# Altium PCB main.PcbDoc
Units mm, origin at the board's own origin, x right, y up, seen from the top; angles counter-clockwise.
Board outline 26 x 25.84 mm, 2 copper layers (Top Layer, Bottom Layer); 4 components, 4 nets, 12 pads, 0 vias.
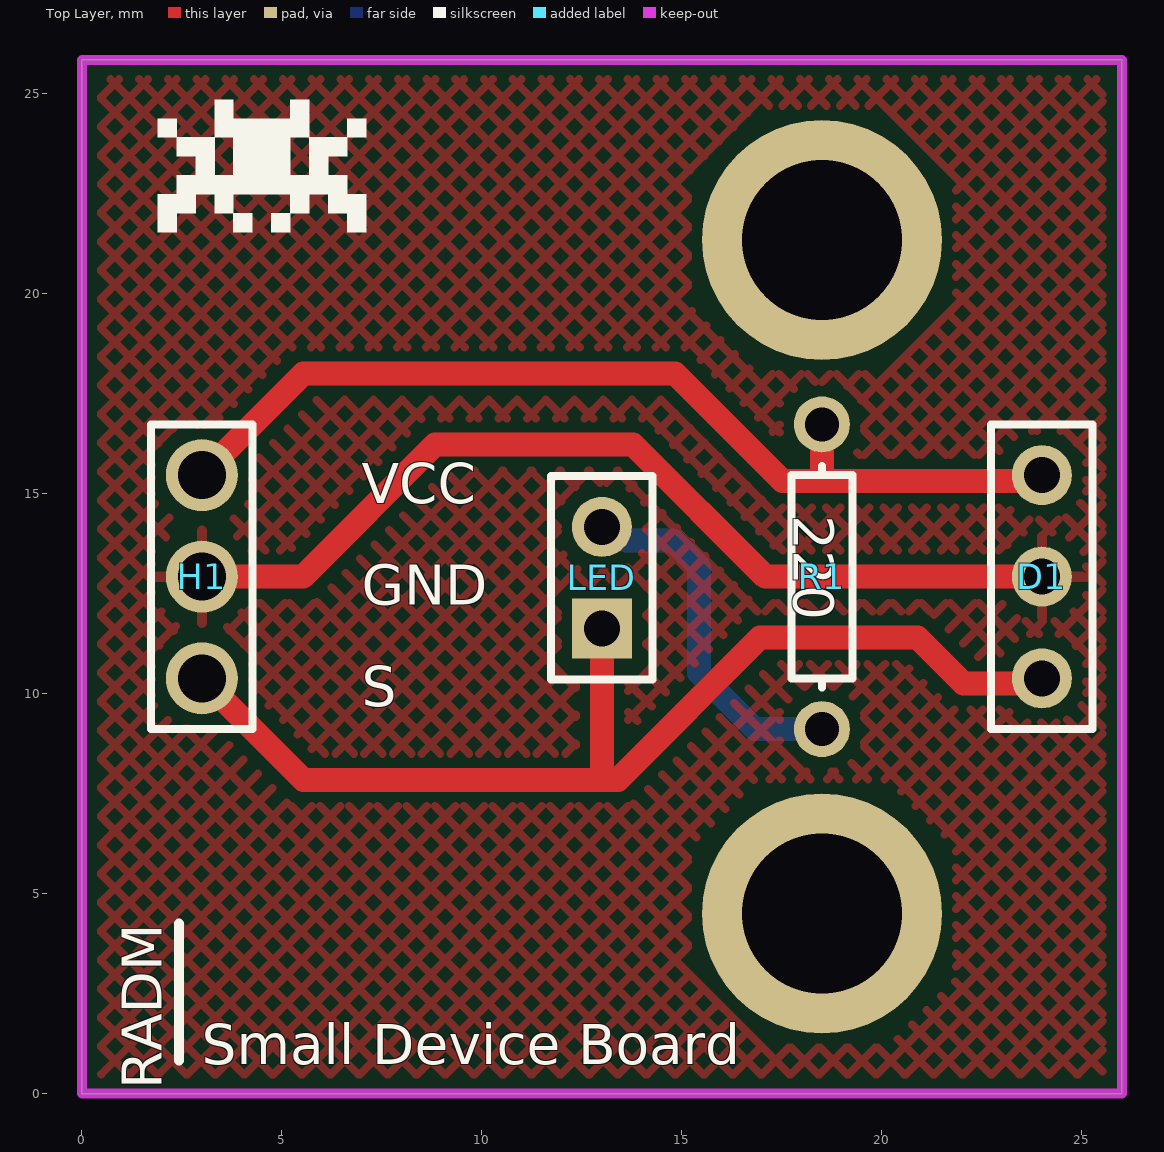
[diagram p0: Top Layer view]
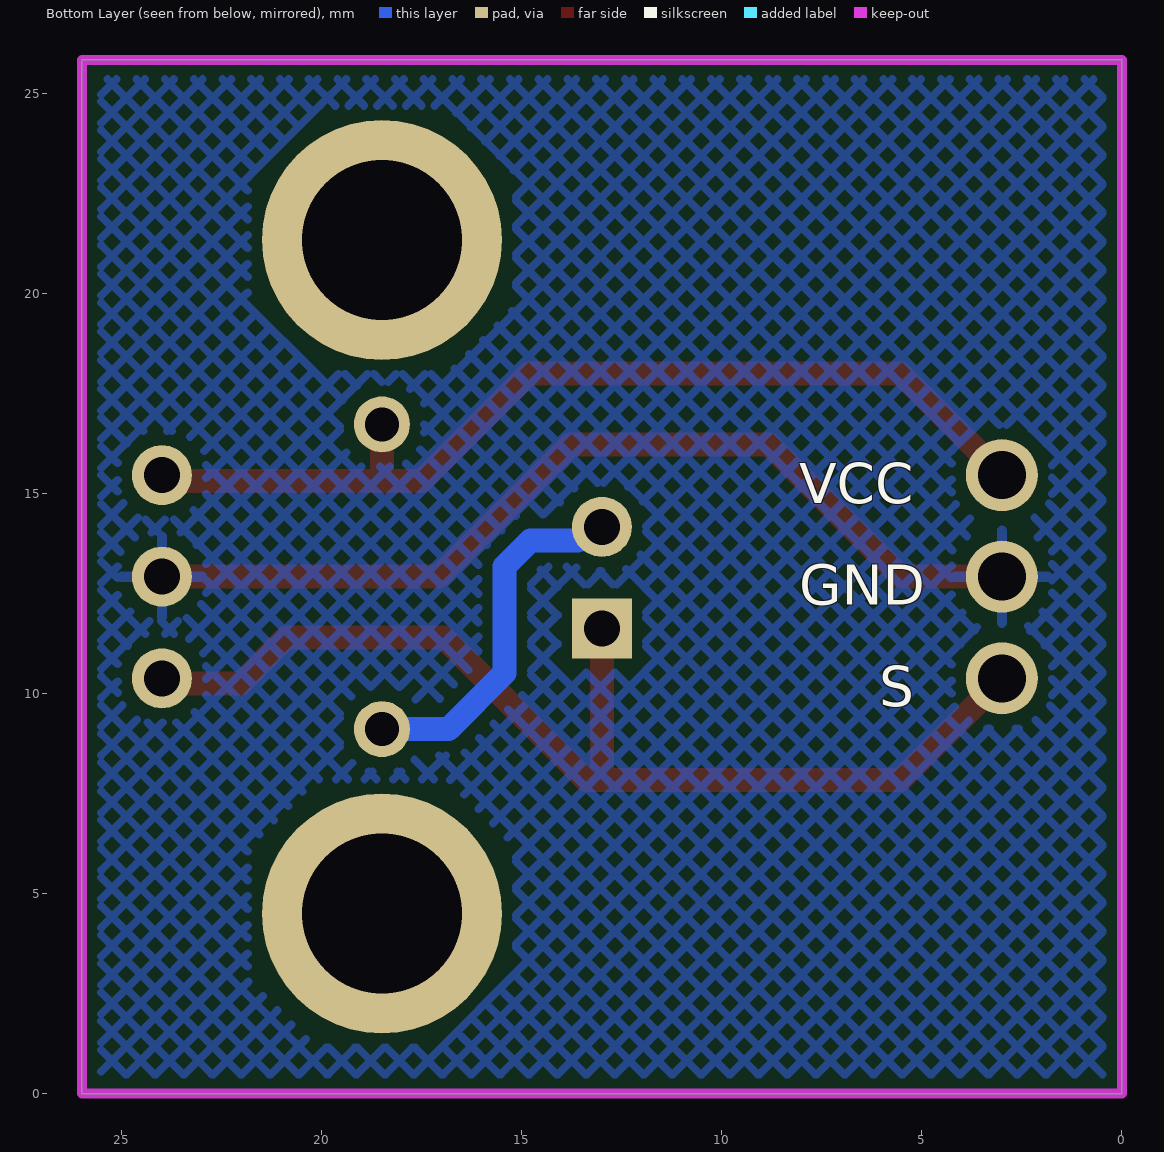
[diagram p1: Bottom Layer view, seen from below]

## Layer stack, top to bottom
Top Solder: solder mask 0.0102, Solder Resist, Dk 3.5
Top Layer: signal copper 0.0356
Dielectric 1: dielectric 0.32, FR-4, Dk 4.8
Bottom Layer: signal copper 0.0356
Bottom Solder: solder mask 0.0102, Solder Resist, Dk 3.5

## Board outline
0,0 0,25.84 26,25.84 26,0

## Design rules (kind name [scope] priority, off if disabled: settings)
Clearance [All] p1: gap=0.254 ignorepadtopadclearanceinfootprint=FALSE except(0: Arc-Hole Track-Hole SMDPad-Hole THPad-Hole Via-Hole Fill-Hole Poly-Hole Region-Hole Text-Hole)
PolygonConnect [All] p1: connectstyle=Relief reliefconductorwidth=0.254 reliefentries=4 polygonreliefangle="90 Angle" airgapwidth=0.254
RoutingVias [All] p1: holewidth=0.711 width=1.27 viastyle="Through Hole" minholewidth=0.711 minwidth=1.27 maxholewidth=0.711 maxwidth=1.27
SolderMaskExpansion [All] p1: expansion=0.102 istentingtop=FALSE
Width [All] p1: maxlimit=0.6 minlimit=0.4 preferedwidth=0.4
30 further rules are at their usual default settings.

## Components (designator, comment, footprint, x,y, rotation, side; value= is the part's Value field where it differs from the comment)
D1 "Small Device" HDR1X3 24,15.46 r270 top
H1 "JST Female 3 Pin" "Jst Female 3pin" 3,15.46 r270 top
LED "LED" "Small Blue LED" 13,14.165 r270 top
R1 "Res1" AXIAL-0.3 18.5,12.92 r90 top value=220

## Footprints (in the part's own frame and the unit in brackets; to place one, negate y for a bottom-side part, rotate by r counter-clockwise, add the part's x,y. Pads: shape width x height; smd on the part's side, far side on the other; paste and mask are expansions set on the pad)
AXIAL-0.3 [mm] "Axial Device, Thru-Hole; 2 Leads; 0.3 in Pin Spacing"
  round 1.4 hole 0.85: 1(-3.81,0) 2(3.81,0)
  silkscreen extent -2.77,-0.76 2.77,0.76
HDR1X3 [mm] "Connector; Header; 3 Position"
  round 1.5 hole 0.9: 1(0,0) 2(2.54,0) 3(5.08,0)
  silkscreen extent -1.27,-1.27 6.35,1.27
"Jst Female 3pin" [mm]
  round 1.8 hole 1.2: 1(0,0) 2(2.54,0) 3(5.08,0)
  silkscreen extent -1.27,-1.27 6.35,1.27, body extent -2.47,-2.33 7.41,3.42, height 7.88
"Small Blue LED" [mm]
  round 1.5 hole 0.9: 1(0,0)
  rect 1.5x1.5 hole 0.9: 2(2.54,0)
  silkscreen extent -1.27,-1.27 3.81,1.27, body extent -0.63,-1.92 2.95,1.92, height 5.6

## Part data
D1: library part "Header 3", "Header, 3-Pin", LatestRevisionDate=17-Jul-2002, LatestRevisionNote="Re-released for DXP Platform.", Publisher="Altium Limited"
LED: library part "Small LED", "3mm LED", Color=Red
R1: "Resistor", LatestRevisionDate=17-Jul-2002, LatestRevisionNote="Re-released for DXP Platform.", PackageDescription="Axial Device, Thru-Hole; 2 Leads; 0.3 in Pin Spacing", PackageReference=AXIAL-0.3, Published=8-Jun-2000, Publisher="Altium Limited"

## Free pads (board coordinates)
  round 6 hole 4: X(18.5,4.5) X(18.5,21.34)

## Nets (pads, with @x,y where several pads share a name; then routed paths per layer and width w, separated by ;. In a path a pad name is that pad's centre, name@x,y a point inside that pad or via, vN(x,y) a via of type N, cw(c..) or ccw(c..) an arc to the next point about the centre after c; other vN are vias at no path point)
GND: D1.2 H1.2 | length 23.7
  Top Layer w0.6: H1.2 5.523,12.92 8.827,16.224 13.78,16.224 17.084,12.92 D1.2
NetLED_1: LED.1 R1.1 | length 9.1
  Bottom Layer w0.6: LED.1@13.051,14.19 13.244,14.19 13.61,13.824 14.783,13.824 15.431,13.176 15.431,10.509 16.83,9.11 R1.1
Signal: D1.3 H1.3 LED.2 | length 27.9
  Top Layer w0.4: D1.3@23.875,10.255 D1.3
  Top Layer w0.6: H1.3 5.54,7.84 13,7.84 ; LED.2@13,11.65 LED.2 13,7.84 ; D1.3@23.875,10.255 22.035,10.255 20.892,11.398 16.955,11.398 13.397,7.84 13,7.84
VCC: D1.1 H1.1 R1.2 | length 24.5
  Top Layer w0.6: H1.1 5.54,18 14.824,18 17.515,15.309 23.849,15.309 D1.1 ; 18.5,15.415 R1.2

## Polygon pours and split planes (outlines as drawn)
GND on Top Layer "GND_L01_P001" (hatched 45Degree grid 0.508 track 0.203, pour order 1): 0,0 26,0 26,25.84 0,25.84
GND on Bottom Layer "GND_L02_P000" (hatched 45Degree grid 0.508 track 0.203, pour order 0): 0,0 26,0 26,25.84 0,25.84

## Keep-outs
Keep-Out Layer:
  the board outline again, w0.254

## Silkscreen, mask and mechanical layers (free items; w line width, h text height)
Top Overlay:
  region: 2.362,23.901 1.892,23.901 1.892,24.375 2.367,24.375 2.367,23.901
  region: 5.211,21.94 5.211,21.53 4.737,21.53 4.737,22.005 5.211,22.005 5.211,21.945
  region: 6.703,23.901 6.634,23.901 6.634,24.375 7.108,24.375 7.108,23.901 6.708,23.901
  region: 3.977,22.005 4.263,22.005 4.263,21.53 3.789,21.53 3.789,22.005 3.972,22.005
  region: 3.315,24.01 3.315,24.849 3.789,24.849 3.789,24.375 5.211,24.375 5.211,24.849 5.686,24.849 5.686,23.901 5.211,23.901 5.211,22.953 5.686,22.953 5.686,23.901 6.634,23.901 6.634,23.427 6.16,23.427 6.16,22.953 6.634,22.953 6.634,22.479 7.108,22.479 7.108,21.53 6.634,21.53 6.634,22.005 6.16,22.005 6.16,22.479 5.686,22.479 5.686,22.005 5.211,22.005 5.211,22.479 3.789,22.479 3.789,22.005 3.315,22.005 3.315,22.479 2.841,22.479 2.841,22.005 2.367,22.005 2.367,21.53 1.892,21.53 1.892,22.479 2.367,22.479 2.367,22.953 2.841,22.953 2.841,23.427 2.367,23.427 2.367,23.901 3.315,23.901 3.315,22.953 3.789,22.953 3.789,23.901 3.315,23.901 3.315,24.005
  lines w0.254: 2.429,0.825 2.429,4.254
  text "VCC" at 7,14.76 h1
  text "220" at 17.8,14.453 h1 r270
  text "GND" at 7,12.22 h1
  text "S" at 7,9.68 h1
  text "Small Device Board" at 3,0.73 h1
  text "RADM" at 2,0.101 h1 r90
Bottom Overlay:
  text "VCC" at 8.066,14.76 h1
  text "GND" at 8.066,12.22 h1
  text "S" at 6.066,9.68 h1